# EAGLE board PIC32Dev2 (EAGLE 5.07)
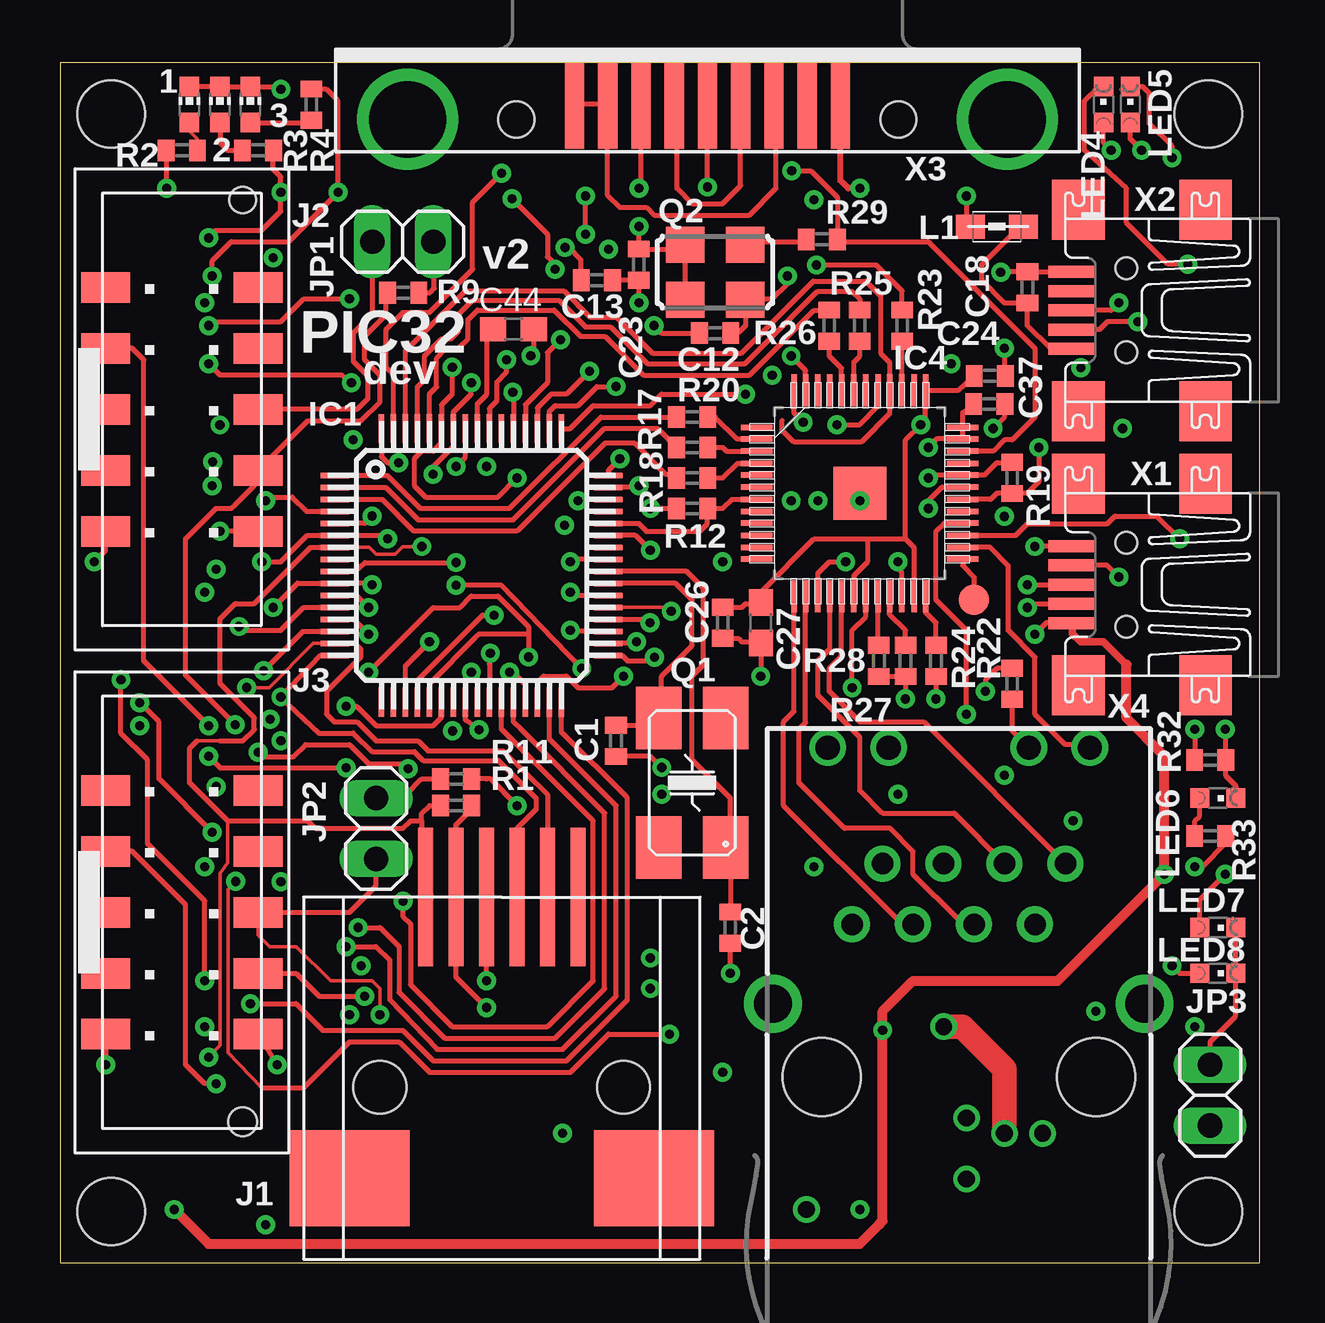
[diagram p0: board, top side]
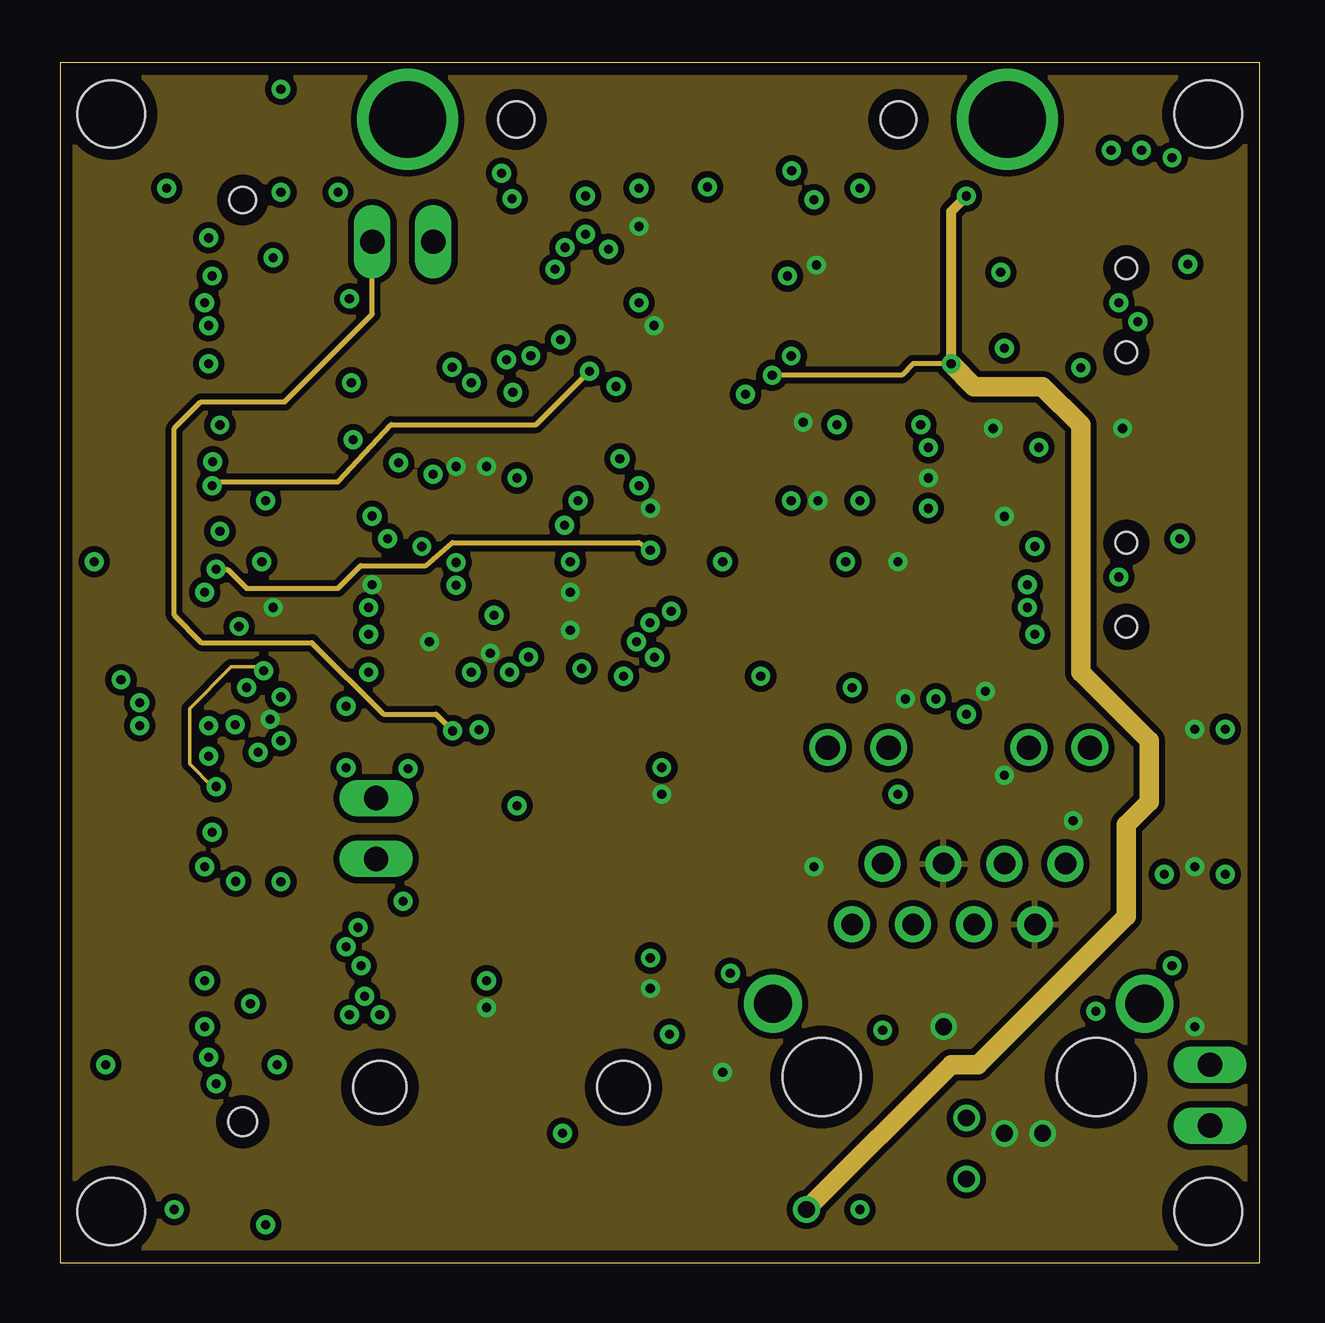
[diagram p1: board, inner layer PwrPlane]
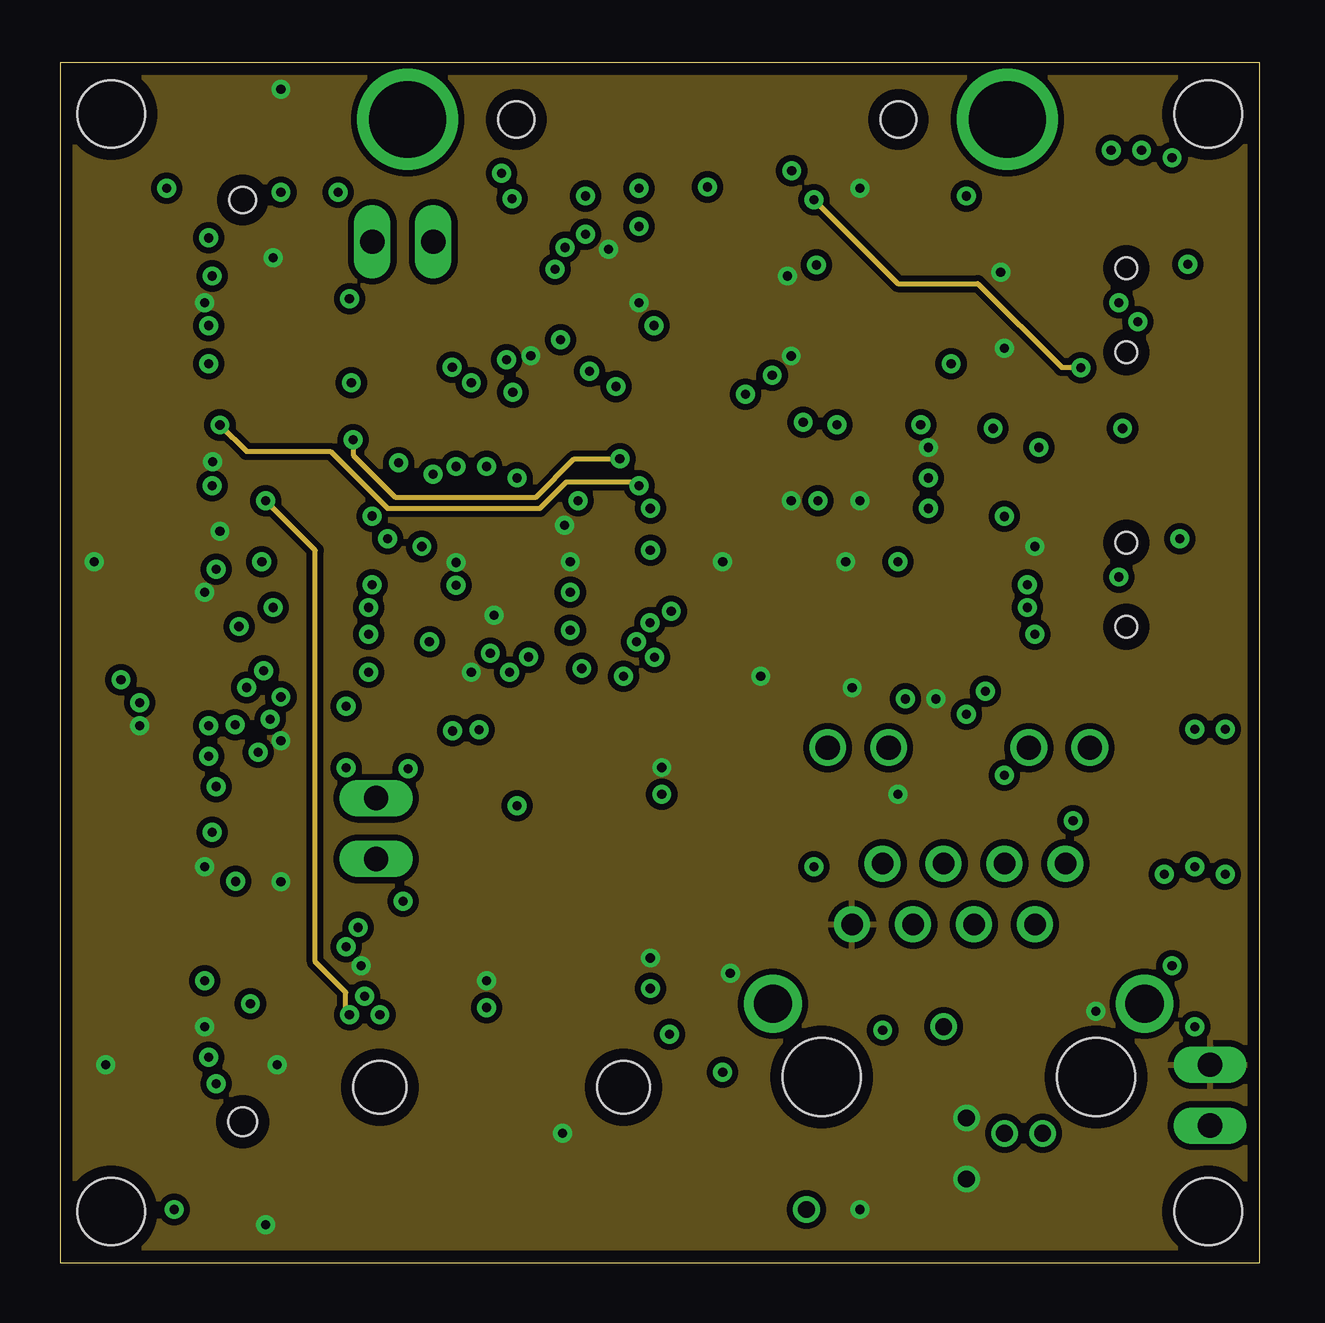
[diagram p2: board, inner layer Gnd]
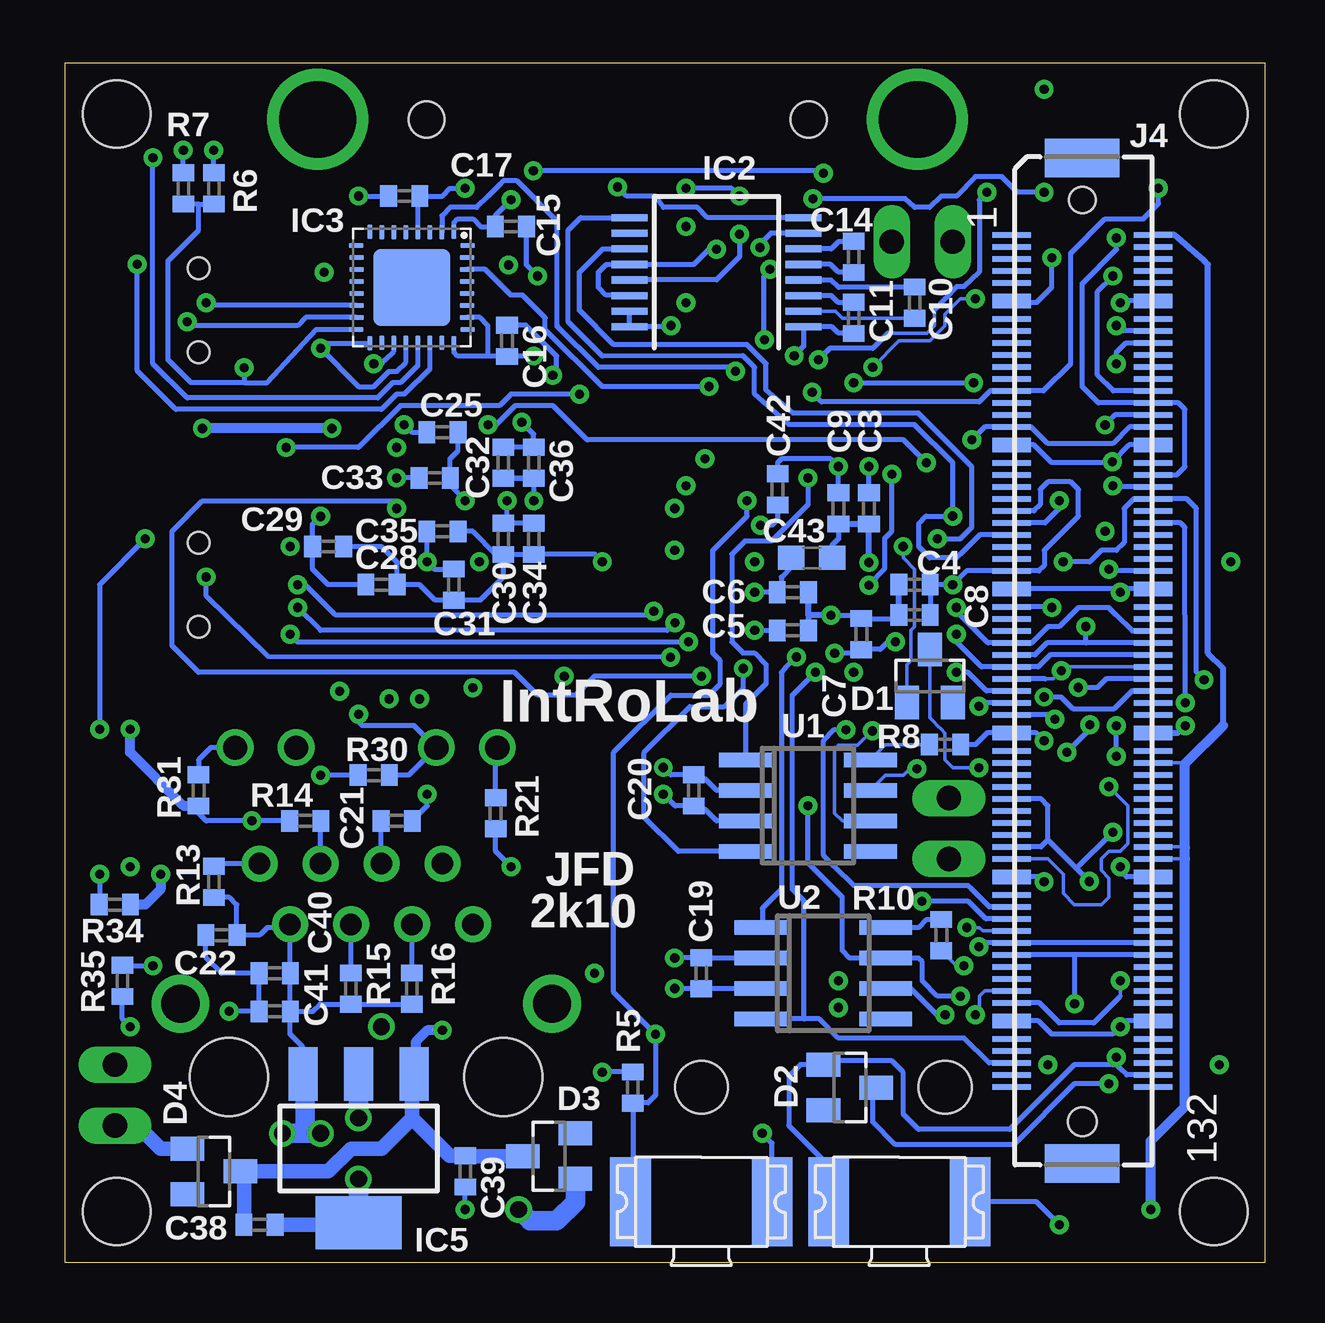
[diagram p3: board, bottom side, seen from below]

Size 50 x 50 mm. Coordinates in mm from the lower left corner, seen from the top.
Outline: 0,0 50,0 50,50 0,50 0,0
Copper layers (1+2*15+16): Top 0.035mm / dielectric 0.25mm / PwrPlane 0.035mm / dielectric 1mm / Gnd 0.035mm / dielectric 0.25mm / Bottom 0.035mm
Design rules "4PCB-4Layers *": minimum track width 6mil, minimum drill 15mil, track to track 6mil, track to pad 6mil, pad to pad 6mil, via to via 6mil, smd to smd 6mil, copper to edge 20mil, drill to drill 8mil, minimum pad ring 10mil, minimum via ring 8mil, stop-mask expansion 4mil, vias tented up to drill 0mil, thermal gap 10mil
Net classes: 0 default: width 0.152 mm, drill 0.381 mm, clearance 0.152 mm; 1 alim: width 0.152 mm, drill 0.381 mm, clearance 0.152 mm
Holes 2.8 mm at 2.13,47.87 47.87,47.87 2.13,2.13 47.87,2.13

## Footprints (pad centres in the part's own frame; a part is rotated, then mirrored left to right if it is on the bottom)
C0402 = smd 0.7 x 0.9: 1 -0.65,0; 2 0.65,0
C0603 = smd 1.1 x 1: 1 -0.85,0; 2 0.85,0
SOT23 = smd 1 x 1.4: 1 -0.95,-1.1; 2 0.95,-1.1; 3 0,1.1
TQFP64-10X10 = smd 1.2 x 0.23: 1 -5.73,2.83; 2 -5.73,2.33; 3 -5.73,1.83; 4 -5.73,1.33; 5 -5.73,0.83; 6 -5.73,0.33; 7 -5.73,-0.17; 8 -5.73,-0.67; 9 -5.73,-1.17; 10 -5.73,-1.67; 11 -5.73,-2.17; 12 -5.73,-2.67; 13 -5.73,-3.17; 14 -5.73,-3.67; 15 -5.73,-4.17; 16 -5.73,-4.67; 33 5.67,-4.67; 34 5.67,-4.17; 35 5.67,-3.67; 36 5.67,-3.17; 37 5.67,-2.67; 38 5.67,-2.17; 39 5.67,-1.67; 40 5.67,-1.17; 41 5.67,-0.67; 42 5.67,-0.17; 43 5.67,0.33; 44 5.67,0.83; 45 5.67,1.33; 46 5.67,1.83; 47 5.67,2.33; 48 5.67,2.83 | smd 0.23 x 1.2: 17 -3.78,-6.62; 18 -3.28,-6.62; 19 -2.78,-6.62; 20 -2.28,-6.62; 21 -1.78,-6.62; 22 -1.28,-6.62; 23 -0.78,-6.62; 24 -0.28,-6.62; 25 0.22,-6.62; 26 0.72,-6.62; 27 1.22,-6.62; 28 1.72,-6.62; 29 2.22,-6.62; 30 2.72,-6.62; 31 3.22,-6.62; 32 3.72,-6.62; 49 3.72,4.78; 50 3.22,4.78; 51 2.72,4.78; 52 2.22,4.78; 53 1.72,4.78; 54 1.22,4.78; 55 0.72,4.78; 56 0.22,4.78; 57 -0.28,4.78; 58 -0.78,4.78; 59 -1.28,4.78; 60 -1.78,4.78; 61 -2.28,4.78; 62 -2.78,4.78; 63 -3.28,4.78; 64 -3.78,4.78
SSOP16 = smd 0.3 x 1.5: 1 -2.275,-3.625; 2 -1.625,-3.625; 3 -0.975,-3.625; 4 -0.325,-3.625; 5 0.325,-3.625; 6 0.975,-3.625; 7 1.625,-3.625; 8 2.275,-3.625; 9 2.275,3.625; 10 1.625,3.625; 11 0.975,3.625; 12 0.325,3.625; 13 -0.325,3.625; 14 -0.975,3.625; 15 -1.625,3.625; 16 -2.275,3.625
QFN32 = smd 0.6 x 0.23: 1 -2.325,1.75; 2 -2.3,1.25; 3 -2.3,0.75; 4 -2.3,0.25; 5 -2.3,-0.25; 6 -2.3,-0.75; 7 -2.3,-1.25; 8 -2.325,-1.75; 17 2.325,-1.75; 18 2.3,-1.25; 19 2.3,-0.75; 20 2.3,-0.25; 21 2.3,0.25; 22 2.3,0.75; 23 2.3,1.25; 24 2.325,1.75 | smd 0.23 x 0.6: 9 -1.75,-2.325; 10 -1.25,-2.3; 11 -0.75,-2.3; 12 -0.25,-2.3; 13 0.25,-2.3; 14 0.75,-2.3; 15 1.25,-2.3; 16 1.75,-2.325; 25 1.75,2.325; 26 1.25,2.3; 27 0.75,2.3; 28 0.25,2.3; 29 -0.25,2.3; 30 -0.75,2.3; 31 -1.25,2.3; 32 -1.75,2.325 | smd 3.2 x 3.2: EXP 0,0
VXH48A = smd 1.321 x 0.229: 1 -4.293,2.743; 2 -4.293,2.261; 3 -4.293,1.753; 4 -4.293,1.245; 5 -4.293,0.762; 6 -4.293,0.254; 7 -4.293,-0.254; 8 -4.293,-0.762; 9 -4.293,-1.245; 10 -4.293,-1.753; 11 -4.293,-2.261; 12 -4.293,-2.743; 25 4.293,-2.743; 26 4.293,-2.261; 27 4.293,-1.753; 28 4.293,-1.245; 29 4.293,-0.762; 30 4.293,-0.254; 31 4.293,0.254; 32 4.293,0.762; 33 4.293,1.245; 34 4.293,1.753; 35 4.293,2.261; 36 4.293,2.743 | smd 0.229 x 1.321: 13 -2.743,-4.293; 14 -2.261,-4.293; 15 -1.753,-4.293; 16 -1.245,-4.293; 17 -0.762,-4.293; 18 -0.254,-4.293; 19 0.254,-4.293; 20 0.762,-4.293; 21 1.245,-4.293; 22 1.753,-4.293; 23 2.261,-4.293; 24 2.743,-4.293; 37 2.743,4.293; 38 2.261,4.293; 39 1.753,4.293; 40 1.245,4.293; 41 0.762,4.293; 42 0.254,4.293; 43 -0.254,4.293; 44 -0.762,4.293; 45 -1.245,4.293; 46 -1.753,4.293; 47 -2.261,4.293; 48 -2.743,4.293 | smd 2.21 x 2.21: HTAB 0,0
SOT223 = smd 1.219 x 2.235: 1 -2.311,-3.099; 2 0,-3.099; 3 2.311,-3.099 | smd 3.6 x 2.2: 4 0,3.099
87545-4111LF = smd 0.63 x 5.76: 1 -3.175,0; 2 -1.905,0; 3 -0.635,0; 4 0.635,0; 5 1.905,0; 6 3.175,0 | smd 5 x 4: P$7 -6.35,-11.71; P$8 6.35,-11.71 | hole 2.2: -5.08,-7.93; 5.08,-7.93
CGRID_10 = smd 1.27 x 2.032: 1 -5.08,-3.175; 2 -5.08,3.175; 3 -2.54,-3.175; 4 -2.54,3.175; 5 0,-3.175; 6 0,3.175; 7 2.54,-3.175; 8 2.54,3.175; 9 5.08,-3.175; 10 5.08,3.175
FX10A-120S/12-S_DATASHEET = smd 0.23 x 1.6: 1 -17.75,-2.95; 2 -17.75,2.95; 3 -17.25,-2.95; 4 -17.25,2.95; 5 -16.75,-2.95; 6 -16.75,2.95; 7 -16.25,-2.95; 8 -16.25,2.95; 9 -15.75,-2.95; 10 -15.75,2.95; 13 -14.25,-2.95; 14 -14.25,2.95; 15 -13.75,-2.95; 16 -13.75,2.95; 17 -13.25,-2.95; 18 -13.25,2.95; 19 -12.75,-2.95; 20 -12.75,2.95; 21 -12.25,-2.95; 22 -12.25,2.95; 23 -11.75,-2.95; 24 -11.75,2.95; 25 -11.25,-2.95; 26 -11.25,2.95; 27 -10.75,-2.95; 28 -10.75,2.95; 29 -10.25,-2.95; 30 -10.25,2.95; 31 -9.75,-2.95; 32 -9.75,2.95; 35 -8.25,-2.95; 36 -8.25,2.95; 37 -7.75,-2.95; 38 -7.75,2.95; 39 -7.25,-2.95; 40 -7.25,2.95; 41 -6.75,-2.95; 42 -6.75,2.95; 43 -6.25,-2.95; 44 -6.25,2.95; 45 -5.75,-2.95; 46 -5.75,2.95; 47 -5.25,-2.95; 48 -5.25,2.95; 49 -4.75,-2.95; 50 -4.75,2.95; 51 -4.25,-2.95; 52 -4.25,2.95; 53 -3.75,-2.95; 54 -3.75,2.95; 57 -2.25,-2.95; 58 -2.25,2.95; 59 -1.75,-2.95; 60 -1.75,2.95; 61 -1.25,-2.95; 62 -1.25,2.95; 63 -0.75,-2.95; 64 -0.75,2.95; 65 -0.25,-2.95; 66 -0.25,2.95; 67 0.25,-2.95; 68 0.25,2.95; 69 0.75,-2.95; 70 0.75,2.95; 71 1.25,-2.95; 72 1.25,2.95; 73 1.75,-2.95; 74 1.75,2.95; 75 2.25,-2.95; 76 2.25,2.95; 79 3.75,-2.95; 80 3.75,2.95; 81 4.25,-2.95; 82 4.25,2.95; 83 4.75,-2.95; 84 4.75,2.95; 85 5.25,-2.95; 86 5.25,2.95; 87 5.75,-2.95; 88 5.75,2.95; 89 6.25,-2.95; 90 6.25,2.95; 91 6.75,-2.95; 92 6.75,2.95; 93 7.25,-2.95; 94 7.25,2.95; 95 7.75,-2.95; 96 7.75,2.95; 97 8.25,-2.95; 98 8.25,2.95; 101 9.75,-2.95; 102 9.75,2.95; 103 10.25,-2.95; 104 10.25,2.95; 105 10.75,-2.95; 106 10.75,2.95; 107 11.25,-2.95; 108 11.25,2.95; 109 11.75,-2.95; 110 11.75,2.95; 111 12.25,-2.95; 112 12.25,2.95; 113 12.75,-2.95; 114 12.75,2.95; 115 13.25,-2.95; 116 13.25,2.95; 117 13.75,-2.95; 118 13.75,2.95; 119 14.25,-2.95; 120 14.25,2.95; 123 15.75,-2.95; 124 15.75,2.95; 125 16.25,-2.95; 126 16.25,2.95; 127 16.75,-2.95; 128 16.75,2.95; 129 17.25,-2.95; 130 17.25,2.95; 131 17.75,-2.95; 132 17.75,2.95 | smd 0.6 x 1.6: 11 -15,-2.95; 12 -15,2.95; 33 -9,-2.95; 34 -9,2.95; 55 -3,-2.95; 56 -3,2.95; 77 3,-2.95; 78 3,2.95; 99 9,-2.95; 100 9,2.95; 121 15,-2.95; 122 15,2.95 | smd 1.6 x 3.1: FOOT$1 -20.95,0; FOOT$2 20.95,0 | hole 1.2: 19.2,0 | hole 1.1: -19.2,0
1X02 = drill 1.016 long: 1 -1.27,0; 2 1.27,0
0805 = smd 1.2 x 1: 1 -1.1,0; 2 1.1,0
CHIP-LED0603 = smd 0.8 x 0.8: A 0,-0.75; C 0,0.75
CHIPLED_0603 = smd 0.8 x 0.8: A 0,-0.75; C 0,0.75
SMT_CRYSTAL = smd 2.6 x 1.9: 1 -2.7,-1.4; 2 2.7,-1.4; 3 2.7,1.4; 4 -2.7,1.4
ASF = smd 1.6 x 1.5: 1 -1.25,-1.15; 2 1.25,-1.15; 3 1.25,1.15; 4 -1.25,1.15
R0402 = smd 0.7 x 0.9: 1 -0.65,0; 2 0.65,0
KSS221GLFS = smd 1.7 x 3.7: A -2.95,0; B 2.95,0
B1,27 = smd 1.27 x 1.27: PP 0,0
SO-08 = smd 0.6 x 2.2: 1 -1.905,-2.6; 2 -0.635,-2.6; 3 0.635,-2.6; 4 1.905,-2.6; 5 1.905,2.6; 6 0.635,2.6; 7 -0.635,2.6; 8 -1.905,2.6
UX60-MB-5ST = smd 2 x 0.5: 1 2.25,1.6; 2 2.25,0.8; 3 2.25,0; 4 2.25,-0.8; 5 2.25,-1.6 | smd 2.2 x 2.5: M1 -3.3,-4.2; M2 -3.3,4.2; M3 2,4.2; M4 2,-4.2 | hole 0.9: 0,-1.75; 0,1.75
DB09_SMT = smd 0.8 x 3.7: 1 -5.54,-6.925; 2 -2.77,-6.925; 3 0,-6.925; 4 2.77,-6.925; 5 5.54,-6.925; 6 -4.155,-6.925; 7 -1.385,-6.925; 8 1.385,-6.925; 9 4.155,-6.925 | drill 3.2 round: P$1 -12.5,-7.55; P$2 12.5,-7.55 | hole 1.5: -7.96,-7.56; 7.96,-7.56
SI-50170 = drill 0.9 pad 1.5 round: 1 4.445,5.842; 2 3.175,3.302; 3 1.905,5.842; 4 0.635,3.302; 5 -0.635,5.842; 6 -1.905,3.302; 7 -3.175,5.842; 8 -4.445,3.302 | drill 1.016 pad 1.5 round: A1 -5.461,10.668; A2 2.921,10.668; C1 -2.921,10.668; C2 5.461,10.668 | drill 1.6 pad 2.2 round: S1 -7.747,0; S2 7.747,0 | hole 3.251: -5.715,-3.048; 5.715,-3.048

## Placement (x,y rotation side)
C1  18p  [C0402]  23.18,21.75 270 top
C2  18p  [C0402]  27.94,13.97 270 top
C3  100n  [C0402]  16.51,31.43 270 bottom
C4  100n  [C0402]  14.61,28.26 180 bottom
C5  100n  [C0402]  19.68,26.35 0 bottom
C6  100n  [C0402]  19.68,27.94 0 bottom
C7  100n  [C0402]  16.83,26.19 90 bottom
C8  100n  [C0402]  14.61,26.99 180 bottom
C9  100n  [C0402]  17.78,31.43 270 bottom
C10  100n  [C0402]  14.61,40.01 90 bottom
C11  100n  [C0402]  17.14,39.37 270 bottom
C12  100n  [C0402]  27.3,38.73 0 top
C13  100n  [C0402]  22.38,40.94 0 top
C14  100n  [C0402]  17.14,41.91 90 bottom
C15  100n  [C0402]  31.43,43.18 180 bottom
C16  4µ7  [C0402]  31.59,38.42 270 bottom
C17  100n  [C0402]  35.88,44.45 0 bottom
C18  10n  [C0402]  40.32,40.64 90 top
C19  100n  [C0402]  23.5,12.06 90 bottom
C20  100n  [C0402]  23.81,19.68 90 bottom
C21  100n  [C0402]  36.2,18.41 0 bottom
C22  100n  [C0402]  43.5,13.65 180 bottom
C23  100n  [C0402]  24.13,41.59 270 top
C24  100n  [C0402]  38.75,36.96 0 top
C25  100n  [C0402]  34.29,34.61 0 bottom
C26  100n  [C0402]  27.62,26.67 270 top
C27  10µ  [C0603]  29.21,26.67 270 top
C28  100n  [C0402]  36.83,28.26 0 bottom
C29  100n  [C0402]  39.05,29.84 0 bottom
C30  100n  [C0402]  31.75,30.16 270 bottom
C31  100n  [C0402]  33.81,28.26 270 bottom
C32  100n  [C0402]  31.75,33.34 270 bottom
C33  100n  [C0402]  34.61,32.7 0 bottom
C34  100n  [C0402]  30.48,30.16 270 bottom
C35  100n  [C0402]  34.29,30.48 0 bottom
C36  100n  [C0402]  30.48,33.34 270 bottom
C37  100n  [C0402]  38.73,35.78 180 top
C38  4µ7  [C0402]  41.91,1.59 0 bottom
C39  100n  [C0402]  33.34,3.81 270 bottom
C40  4µ7  [C0402]  41.27,12.06 180 bottom
C41  100n  [C0402]  41.27,10.48 180 bottom
C42  1µ  [C0402]  20.32,32.23 270 bottom
C43  10µ  [C0603]  18.89,29.37 0 bottom
C44  10u  [C0603]  18.9,38.9 0 top
D1  BAS70-05  [SOT23]  13.97,24.45 0 bottom
D2  BAS70-05  [SOT23]  17.3,7.3 270 bottom
D3  BAS70  [SOT23]  29.84,4.45 90 bottom
D4  BAS70  [SOT23]  43.81,3.81 270 bottom
IC1  PIC32MX795F512H  [TQFP64-10X10]  17.18,29.98 0 top
IC2  MAX3221CAE  [SSOP16]  22.86,41.27 90 bottom
IC3  FT232RQ  [QFN32]  35.56,40.64 270 bottom
IC4  DP83848  [VXH48A]  33.34,32.07 0 top
IC5  TC1262-3.3  [SOT223]  37.78,4.76 180 bottom
J1  ICD3  [87545-4111LF]  18.41,15.24 0 top
J2  CAN1  [CGRID_10]  5.08,35.56 270 top
J3  CAN2  [CGRID_10]  5.08,14.61 270 top
J4  Exp  [FX10A-120S/12-S_DATASHEET]  7.62,25.08 270 bottom
JP1  CAN2  [1X02]  14.29,42.55 180 top
JP2  CAN2  [1X02]  13.18,18.1 270 top
JP3  PWR  [1X02]  47.94,6.99 90 top
L1  MI0805K400R-10  [0805]  39.05,43.18 180 top
LED1  [CHIP-LED0603]  5.4,48.26 0 top
LED2  [CHIP-LED0603]  6.67,48.26 0 top
LED3  [CHIP-LED0603]  7.94,48.26 0 top
LED4  [CHIPLED_0603]  43.5,48.26 0 top
LED5  [CHIPLED_0603]  44.61,48.26 0 top
LED6  [CHIPLED_0603]  48.26,19.37 270 top
LED7  [CHIPLED_0603]  48.26,13.97 270 top
LED8  [CHIPLED_0603]  48.26,12.06 270 top
Q1  8MHz  [SMT_CRYSTAL]  26.35,20 90 top
Q2  FXO-HC536R-50  [ASF]  27.3,41.27 0 top
R1  10k  [R0402]  16.51,19.05 0 top
R2  800  [R0402]  5.08,46.35 180 top
R3  800  [R0402]  8.26,46.35 0 top
R4  800  [R0402]  10.48,48.26 90 top
R5  10k  [R0402]  26.35,7.3 90 bottom
R6  800  [R0402]  43.81,44.77 270 bottom
R7  800  [R0402]  45.09,44.77 270 bottom
R8  10k  [R0402]  13.34,21.59 0 bottom
R9  120  [R0402]  14.31,40.42 180 top
R10  10k  [R0402]  13.49,13.65 270 bottom
R11  120  [R0402]  16.51,20.16 0 top
R12  1k5  [R0402]  26.35,31.43 0 top
R13  49R9  [R0402]  43.81,15.88 270 bottom
R14  49R9  [R0402]  40.01,18.41 180 bottom
R15  49R9  [R0402]  38.1,11.43 270 bottom
R16  49R9  [R0402]  35.56,11.43 270 bottom
R17  33  [R0402]  26.35,33.97 0 top
R18  33  [R0402]  26.35,32.7 0 top
R19  1k5  [R0402]  39.69,32.7 90 top
R20  33  [R0402]  26.35,35.24 0 top
R21  250  [R0402]  32.07,18.73 270 bottom
R22  250  [R0402]  39.69,24.13 90 top
R23  2k2  [R0402]  35.11,39.05 270 top
R24  4k87  [R0402]  36.51,25.08 270 top
R25  33  [R0402]  33.34,39.05 270 top
R26  33  [R0402]  32.07,39.05 270 top
R27  2k2  [R0402]  35.24,25.08 270 top
R28  2k2  [R0402]  34.13,25.08 270 top
R29  33  [R0402]  31.75,42.65 0 top
R30  2k2  [R0402]  37.15,20.32 180 bottom
R31  2k2  [R0402]  44.45,19.68 270 bottom
R32  2k2  [R0402]  47.94,20.95 180 top
R33  510  [R0402]  47.94,17.78 0 top
R34  1k65  [R0402]  47.94,14.92 0 bottom
R35  800  [R0402]  47.62,11.75 270 bottom
SW1  SMT_PB_S  [KSS221GLFS]  15.24,2.54 0 bottom
SW2  SMT_PB_S  [KSS221GLFS]  23.5,2.54 0 bottom
TP1  TPB1,27  [B1,27]  38.1,27.62 0 top
U1  SN65HVD230  [SO-08]  19.05,19.05 270 bottom
U2  SN65HVD230  [SO-08]  18.41,12.06 270 bottom
X1  MINI-USB-UX60-MB-5ST  [UX60-MB-5ST]  44.45,28.26 180 top
X2  MINI-USB-UX60-MB-5ST  [UX60-MB-5ST]  44.45,39.69 180 top
X3  [DB09_SMT]  26.99,55.19 0 top
X4  SI-50170  [SI-50170]  37.47,10.79 0 top

## Library data of the parts
C1-C44 R1-R35 = rcl
D1-D4 = diode
IC1 = PIC32MX795F512
IC2 = maxim2
IC3 = ftdichip2
IC4 = DP83848
IC5 = linear-technology
J1 = RJ12_smt_87545-4111LF
J2 J3 = con-molex-cgrid_smt
J4 = conn-hirose2
JP1-JP3 = pinhead
L1 = wuerth-elektronik
LED1-LED8 = led
Q1 = ABMM2-8.000MHZ-E2-T
Q2 = crystal
SW1 SW2 = jfduval
TP1 = testpad
U1 U2 = Microchip4 Pic
X1 X2 = con-hirose2
X3 = con-subd-smt
X4 = con-stewart2

## Nets
+3V3: C3.1 C4.1 C5.1 C6.1 C7.1 C8.1 C9.1 C12.1 C19.1 C20.1 C21.1 C22.1 C23.1 C28.1 C29.1 C30.1 C31.1 C32.1 C33.1 C34.1 C35.1 C36.1 C37.1 C40.1 C41.1 C42.1 C43.1 IC1.10 IC1.19 IC1.26 IC1.35 IC1.38 IC1.57 IC2.15 IC2.16 IC4.22 IC4.32 IC4.48 IC5.3 J1.2 J4.43 J4.53 J4.57 J4.75 Q2.1 Q2.4 R1.2 R5.2 R12.1 R13.2 R14.2 R15.2 R16.2 R19.2 R21.2 R22.2 R23.1 R27.2 R28.2 R30.2 R31.2 R32.2 R33.2 R35.2 U1.3 U2.3 X4.2 X4.5
+5V: C16.1 C17.1 D3.1 IC3.19 L1.2
+5V/1: C38.1 C39.1 D3.3 D4.3 IC1.34 IC5.1 J4.2 J4.80 J4.82 J4.96 J4.98 R34.2 X1.1
CAN1H: J2.8 R9.2 U1.7
CAN1L: J2.6 JP1.2 U1.6
CAN1RX: IC1.58 J4.18 U1.4
CAN1TX: IC1.59 J4.16 U1.1
CAN2H: J3.8 R11.2 U2.7
CAN2L: J3.6 JP2.2 U2.6
CAN2RX: IC1.29 J4.127 U2.4
CAN2TX: IC1.21 J4.71 U2.1
D+: IC1.37 X1.3
D-: IC1.36 X1.2
EMDC: IC1.30 IC4.31
EMDIO: IC1.49 IC4.30 R19.1
EREF_CLK: IC1.63 IC4.34 R29.2
ERXD0: IC1.61 R25.1
ERXD1: IC1.60 R26.1
ERXDV: IC1.62 IC4.40
ERXERR: IC1.64 IC4.41
ETXD0: IC1.2 R17.1
ETXD1: IC1.3 R18.1
ETXEN: IC1.1 R20.1
GND: C1.2 C2.2 C3.2 C4.2 C5.2 C6.2 C7.2 C8.2 C9.2 C11.2 C12.2 C13.2 C15.1 C16.2 C17.2 C18.2 C19.2 C20.2 C21.2 C22.2 C23.2 C24.2 C25.2 C26.2 C27.2 C28.2 C29.2 C30.2 C31.2 C32.2 C33.2 C34.2 C35.2 C36.2 C37.2 C38.2 C39.2 C40.2 C41.2 C42.2 C43.2 C44.2 IC1.9 IC1.20 IC1.25 IC1.41 IC2.1 IC2.12 IC2.14 IC3.4 IC3.17 IC3.20 IC3.24 IC3.26 IC4.15 IC4.19 IC4.35 IC4.36 IC4.47 IC4.HTAB IC5.2 IC5.4 J1.3 J2.9 J2.10 J3.9 J3.10 J4.11 J4.12 J4.33 J4.34 J4.55 J4.56 J4.77 J4.78 J4.99 J4.100 J4.121 J4.122 JP3.2 LED1.C LED2.C LED3.C LED7.C LED8.C Q2.2 R8.2 R10.2 R24.2 SW1.B SW2.B U1.2 U2.2 X1.5 X2.5 X3.5 X4.8
INT3: IC1.44 IC4.7 R12.2
LED_ACT: IC4.26 R31.1 X4.C2
LED_LINK: IC4.28 R30.1 X4.C1
LED_SPEED: IC4.27 LED6.C R32.1
MCLR: D1.1 D2.1 IC1.7 J1.1 J4.130 R1.1 SW1.A
MDI_RN: IC4.13 R16.1 X4.6
MDI_RP: IC4.14 R15.1 X4.4
MDI_TN: IC4.16 R14.1 X4.3
MDI_TP: IC4.17 R13.1 X4.1
MST_RESET1: D1.3 J2.3
MST_RESET2: D2.3 J3.3
N$1: LED1.A R2.1
N$2: LED2.A R3.1
N$3: LED3.A R4.1
N$4: IC2.8 X3.3
N$5: C10.1 IC2.2
N$6: C10.2 IC2.4
N$7: C14.1 IC2.5
N$8: C14.2 IC2.6
N$9: C11.1 IC2.3
N$10: C13.1 IC2.7
N$11: IC4.3 R17.2
N$12: IC4.4 R18.2
N$13: IC2.13 X3.2
N$14: IC4.2 R20.2
N$15: X3.7 X3.8
N$16: X3.1 X3.4 X3.6
N$17: IC4.43 R25.2
N$19: IC4.44 R26.2
N$20: IC4.25 TP1.PP
N$21: IC4.20 R28.1
N$22: IC4.21 R27.1
N$23: IC4.24 R24.1
N$24: LED6.A R33.1
N$25: IC4.39 R23.2
N$26: R21.1 X4.A1
N$27: R22.1 X4.A2
N$28: LED7.A R34.1
N$29: D4.1 JP3.1
N$30: C44.1 IC1.56
N$32: C18.1 L1.1 X2.1
N$33: R8.1 U1.8
N$34: R10.1 U2.8
N$35: Q2.3 R29.1
N$36: LED8.A R35.1
N$39: JP2.1 R11.1
N$40: JP1.1 R9.1
N$41: C1.1 IC1.39 Q1.3
N$42: C2.1 IC1.40 Q1.1
N$106: C15.2 IC3.1 IC3.16 R6.2 R7.2
N$109: IC3.22 LED4.C
N$110: IC3.21 LED5.C
N$116: LED4.A R6.1
N$117: LED5.A R7.1
PFOUT: C24.1 C25.1 C26.1 C27.1 IC4.18 IC4.23 IC4.37
PGEC1: IC1.15 J1.5 J4.70
PGED1: IC1.16 J1.4 J4.72
RB2: IC1.14 J4.68 J4.69 J4.97
RB3: IC1.13 J4.66 J4.67
RB4: IC1.12 J4.64 J4.65
RB5: IC1.11 J4.62 J4.63
RB9: IC1.22 J4.73
RB11: IC1.24 J4.103
RB12: IC1.27 J4.105
RB13: IC1.28 J4.107
RC13: IC1.47 J4.30
RC14: IC1.48 J4.31 J4.32
RD0: IC1.46 J4.46 J4.87 J4.95 R5.1 SW2.A
RD4: IC1.52 J4.28 J4.38 R3.2
RD5: IC1.53 J4.25 R2.2
RD6: J4.24
RD7: IC1.55 J4.26 R4.2
RD9: IC1.43 J4.54
RF4: IC1.31 J4.109 J4.110
RF5: IC1.32 J4.111 J4.112
RG6: IC1.4 J4.45 J4.117
RX1: IC1.51 IC3.2 J4.40
RX2: IC1.5 IC2.9 J4.47
TX1: IC1.50 IC3.30
TX2: IC1.6 IC2.11 J4.42 J4.119
USB+: IC3.14 X2.3
USB-: IC3.15 X2.2
USBID: IC1.33 X1.4

## Tracks (layer width: path | path; a pad name or v marks a point on that pad's centre or on a via)
+3V3  (via drill 0.38, 0.7)
  Top 0.203: IC1.35 21.59,26.31 v21.27,26.35 | IC1.38 21.4,27.81 v21.27,27.94 | IC1.10 12.96,28.31 v13.02,28.26 | IC1.57 16.91,33.57 v16.51,33.18 | IC1.26 17.91,24.96 v17.94,25.4 | v36.2,32.7 36.32,32.83 IC4.32 38.54,32.83 39.05,33.34 39.67,33.34 R19.2 | IC4.22 35.09,28.73 v34.92,29.21 | R28.2 R27.2 v35.24,23.5 | v24.61,31.43 R12.1 | R33.2 48.59,17.48 47.62,16.51 v47.31,16.51 | R32.2 47.29,22.21 v47.31,22.23 | v38.58,23.81 38.58,24.29 39.05,24.77 39.67,24.77 R22.2 | C37.1 39.38,35.26 v38.89,34.77 | Q2.1 Q2.4 25.86,42.23 24.14,42.23 C23.1 | C23.1 24.13,42.23 | C23.1 v24.13,43.18 | C12.1 25.08,38.73 v24.77,39.05 | v17.78,10.64 17.3,11.11 16.51,11.91 J1.2 16.51,18.26 16.83,18.57 | 16.83,18.57 | 16.83,18.57 16.99,18.73 16.99,19.04 R1.2 | 11.4,28.32 9.91,28.32 v8.89,27.3 | IC1.19 14.4,24.88 v15.4,25.88 | IC4.48 30.59,35.41 v30.98,35.02 | v31.53,41.58 34.02,41.58 35.1,40.5 R23.1
  Top 1.016: v36.83,9.84 37.62,9.84 39.37,8.1 v39.37,5.4
  Bottom 0.203: v21.27,26.35 C5.1 | v21.27,27.94 C6.1 20.16,28.11 20.16,28.57 19.74,29 C43.1 | C9.1 v17.78,33.18 18.1,33.5 20.16,33.5 20.32,33.34 C42.1 | C3.1 v16.51,33.18 | 16.5,25.4 C7.1 16.52,25.4 v17.94,25.4 | R16.2 R15.2 39.38,10.78 39.69,10.48 C41.1 | IC5.3 40.09,8.98 40.64,9.53 40.64,10.46 C41.1 | C21.1 36.84,16.65 X4.5 | R5.2 27.61,7.95 v27.62,7.94 | R13.2 43.16,15.22 42.86,14.92 42.86,13.67 C22.1 41.91,13.65 41.59,13.97 40.77,13.97 X4.2 40.62,14.08 C40.1 C41.1 | R35.2 47.62,10.16 v47.31,9.84 | C35.1 34.92,30.46 v34.92,29.21 34.62,28.91 C31.1 | C33.1 v36.2,32.7 | C32.1 C36.1 30.48,34.52 v30.98,35.02 | C34.1 C30.1 31.59,30.97 v31.59,31.75 | R14.2 v42.23,18.41 44.13,18.41 44.45,18.73 R31.2 | R30.2 v39.37,20.32 | R21.2 32.07,17.14 v31.43,16.51 | C28.1 39.05,28.26 39.69,28.89 39.69,29.83 C29.1 39.7,30.78 v39.37,31.1 | J4.75 8.92,22.83 v8.76,22.65 | J4.57 8.92,27.33 v8.89,27.3 | IC2.15 IC2.16 24.82,39 v24.77,39.05 | U2.3 23.48,11.43 C19.1 24.59,11.41 v24.61,11.43 | C20.1 23.8,19.05 | C20.1 24.59,19.04 v25.08,19.53 | C8.1 C4.1 v13.02,28.26 12.44,28.83 J4.53 9.43,28.83 9.21,29.05 9.21,29.69 7.78,31.11 7.78,32.23 8.1,32.54 9.05,32.54 9.37,32.23 9.37,31.59 9.62,31.33 J4.43 | U1.3 22.86,18.41 23.34,18.89 23.67,18.89 C20.1 | v15.4,25.88 15.72,25.88 16.03,25.56 16.83,25.56
  Bottom 0.406: R31.2 45.09,19.05 47.31,21.27 v47.31,22.23 | v38.89,34.77 v44.29,34.77
  Bottom 0.813: v39.37,5.4 40.01,5.4 | 40.01,5.4 v40.96,5.4 | 40.01,5.4 40.01,7.62
  pour PwrPlane (isolate 0.254): 0,50.16 50.16,50.16 50.16,0 0,0
+5V  (via drill 0.38, 0.7)
  Top 0.203: v37.78,44.45 37.78,43.67 L1.2
  PwrPlane 0.203: v29.69,36.99 35.08,36.99 35.56,37.47 v37.15,37.47
  PwrPlane 0.406: v37.15,37.47 37.15,43.81 v37.78,44.45
  PwrPlane 0.813: v31.11,2.22 37.15,8.26 38.26,8.26 44.45,14.45 44.45,18.26 45.4,19.21 45.4,21.75 42.55,24.61 42.55,34.92 40.96,36.51 38.1,36.51 v37.15,37.47
  Bottom 0.203: v37.78,44.45 C17.1 | IC3.19 36.31,37.98 36.67,37.62 | 36.67,37.62 | 36.67,37.62 36.83,37.47 v37.15,37.47 | C16.1 30.81,39.07 29.53,37.78 29.53,37.15 v29.69,36.99
  Bottom 0.813: D3.1 28.75,2.53 29.53,1.75 30.64,1.75 v31.11,2.22
+5V/1  (via drill 0.38)
  Top 0.203: IC1.34 23.91,25.81 v24.04,25.88 | v40.64,26.19 | v40.64,26.19 41.12,26.67 42.19,26.67 X1.1
  Top 0.305: X1.1 42.2,26.22 42.55,25.88 43.5,25.88 44.45,24.92
  Top 0.406: v34.29,9.68 34.29,10.48 35.56,11.75 41.59,11.75 v46.04,16.19 46.04,21.11 44.45,22.7 44.45,24.92 | v4.76,2.22 6.19,0.79 33.34,0.79 34.13,1.59 34.29,1.75 v34.29,9.68 | v34.29,9.68
  Bottom 0.152: J4.80 J4.82 3.37,20.83 3.33,20.8 | J4.98 3.34,16.83 3.33,16.83 | J4.96 3.36,17.33 3.33,17.3
  Bottom 0.203: v24.04,25.88 40.32,25.88 v40.64,26.19
  Bottom 0.254: J4.2 3.78,42.83 2.54,41.75 2.38,41.59 2.38,25.4 1.75,24.77 1.75,22.38
  Bottom 0.406: v46.04,16.19 46.04,15.56 46.67,14.92 R34.2 | v4.76,2.22 4.76,5.08 3.33,6.51 3.33,16.83 3.33,17.3 3.33,20.8 1.75,22.38 | v34.29,9.68 34.92,9.68 35.4,9.21 35.4,7.93 IC5.1 35.56,7.77
  Bottom 0.61: D3.3 33.32,4.45 C39.1 33.99,4.46 35.56,6.03 | 35.56,7.77 35.56,6.03 | C38.1 42.56,3.65 D4.3 39.05,3.81 38.1,4.76 36.83,4.76 35.56,6.03
CAN1H  (via drill 0.38)
  Top 0.203: 12.7,38.58 12.7,37.62 13.34,36.99 13.34,35.88 12.54,35.08 10.32,35.08 J2.8 8.1,32.86 8.1,32.38 7.3,31.59 | 12.7,38.58 | v8.26,21.27 8.1,21.43 8.45,21.08 9.72,21.08 10.24,21.59 12.06,21.59 12.86,20.8 14.29,20.8 v14.51,20.59 | 7.3,31.59 7.14,31.43 6.51,31.43 5.87,30.8 5.24,30.16 5.24,24.48 v7.3,22.42 | 7.3,31.59 | 12.7,38.58 12.7,38.6 13.6,39.5 13.6,40.36 R9.2
  Bottom 0.152: v14.51,20.59 14.81,20.59 15.08,20.32 15.81,20.32 U1.7
  Bottom 0.203: v7.3,22.42 7.3,22.23 v8.26,21.27
CAN1L  (via drill 0.38)
  Top 0.203: J2.6 12.38,35.56 12.83,36.01 12.83,36.96 12.22,37.56 12.22,38.73 13.02,39.53 JP1.2
  PwrPlane 0.203: JP1.2 13.02,39.53 9.37,35.88 5.87,35.88 4.76,34.77 4.76,26.99 5.89,25.84 10.49,25.84 13.49,22.86 15.67,22.86 v16.37,22.16
  Bottom 0.152: U1.6 17.62,18.41 17.94,18.73 17.94,21.4 17.78,21.57 16.99,21.57 v16.37,22.16
CAN1RX  (via drill 0.38)
  Top 0.203: 15.88,33.5 16.41,34.03 IC1.58 16.41,35.45 17.14,36.2 v17.14,36.67 | 15.88,33.5 | 15.72,33.34 15.88,33.5 | 15.72,33.34 | 15.72,33.34 15.56,33.18 v15.56,32.86 | v16.51,28.23 18.41,28.23 v21.75,24.77 | v6.19,37.47 6.67,36.99 11.75,36.99 v12.14,36.67
  Bottom 0.203: v21.75,24.77 21.75,23.97 22.54,23.18 23.97,23.18 25.88,21.27 25.88,18.57 24.45,17.14 U1.4 | v21.75,24.77 | J4.18 5.8,38.33 6.19,37.94 v6.19,37.47 | v17.14,36.67 v12.14,36.67 | v15.56,32.86 15.56,30.48 15.84,30.19 15.84,28.92 v16.51,28.23
CAN1TX  (via drill 0.38)
  Top 0.203: v19.05,32.7 18.26,31.91 15.24,31.91 14.76,32.38 14.76,33.5 15.08,33.81 15.56,33.81 15.9,34.16 IC1.59 15.9,35.75 16.35,36.2 v16.35,37.32 | v6.19,39.05 | v6.19,39.05 6.35,39.21 9.21,39.21 10.16,40.16 v12.06,40.16
  Bottom 0.152: v12.06,40.16 12.7,40.16 13.34,39.53 13.34,39.05 13.97,38.42 15.26,38.42 v16.35,37.32
  Bottom 0.203: U1.1 21.65,23.28 20.8,24.13 20.8,24.92 21.29,25.42 21.77,25.42 22.23,25.88 22.23,29.53 21.68,30.07 20.57,30.07 19.05,31.59 v19.05,32.7 | J4.16 5.97,38.83 v6.19,39.05
CAN2H  (via drill 0.38)
  Top 0.203: v12.7,11.11 10.79,11.11 9.84,12.06 J3.8 | R11.2 17.78,20.16 17.94,20.16 v19.05,19.05
  Bottom 0.203: v12.7,11.11 13.65,11.11 14.29,11.75 14.29,12.54 14.45,12.7 U2.7 17.3,12.7 17.62,13.02 17.62,15.24 19.05,16.67 v19.05,19.05
CAN2L  (via drill 0.38)
  Top 0.152: J3.6 8.26,13.65 8.73,13.18 9.84,13.18 11.27,11.75 13.02,11.75 13.34,11.43 v13.34,10.34
  Top 0.203: J3.6 12.06,14.61 13.18,15.72 JP2.2
  Bottom 0.203: U2.6 14.76,11.43 13.67,10.34 v13.34,10.34
CAN2RX  (via drill 0.38)
  Top 0.203: IC1.29 19.41,24.09 18.89,24.61 v18.73,24.61
  Bottom 0.203: J4.127 11.51,8.33 12.54,9.37 17.78,9.37 18.57,10.16 19.21,10.16 | v18.73,24.61 19.7,23.65 19.7,15.56 19.53,15.4 19.21,15.08 19.21,10.16 | 19.21,10.16 U2.4
CAN2TX  (via drill 0.38)
  Top 0.203: IC1.21 15.4,24.14 17.3,26.04 | v12.86,24.61 | 17.3,26.04 | 17.3,26.04 17.46,26.19 18.89,26.19 | 18.89,26.19 | v12.86,24.61 15.56,27.3 16.67,27.3 17.14,27.78 18.26,27.78 18.89,27.15 19.53,26.51 19.53,26.19 | 19.53,26.19 v19.53,25.24 | v19.53,25.24 | 19.53,26.19 18.89,26.19
  Bottom 0.203: v19.53,25.24 20,24.77 20.16,24.61 20.16,15.56 20.95,14.76 20.95,14.03 U2.1 | J4.71 11.61,23.83 12.38,24.61 v12.86,24.61 | v12.86,24.61
D+  (via drill 0.38)
  Top 0.152: IC1.37 25.08,27.31 v25.48,27.15
  Top 0.203: v40.32,28.26 X1.3
  Bottom 0.203: v40.32,28.26 40.01,28.26 38.73,26.99 25.64,26.99 v25.48,27.15
D-  (via drill 0.38)
  Top 0.203: IC1.36 24.31,26.81 v24.59,26.67 | X1.2 40.48,27.46 v40.32,27.3
  Bottom 0.203: v24.59,26.67 24.92,26.35 39.37,26.35 v40.32,27.3
EMDC  (via drill 0.38)
  Top 0.203: IC4.31 36.77,32.32 36.2,31.75 v36.2,31.43 | IC1.30 19.91,24.19 20.16,24.45 21.11,24.45 21.59,23.97 23.02,23.97 v23.5,24.45
  Bottom 0.203: v36.2,31.43 36.2,31.75 44.29,31.75 45.56,30.48 45.56,25.72 44.45,24.61 31.27,24.61 30.32,23.65 28.73,23.65 27.94,24.45 v23.5,24.45
EMDIO  (via drill 0.38)
  Top 0.203: IC4.30 38.8,31.81 39.05,32.07 39.67,32.07 R19.1 39.7,32.07 40.32,32.07 40.8,32.54 v40.8,33.97 | v28.57,36.2 25.08,36.2 24.61,35.72 22.23,35.72 22.07,35.56 | IC1.49 21.27,34.76 22.07,35.56 | 22.07,35.56
  Bottom 0.203: v28.57,36.2 31.43,36.2 31.91,35.72 36.04,35.72 37.78,33.97 v40.8,33.97
EREF_CLK  (via drill 0.38)
  Top 0.203: IC4.34 38.9,33.82 39.37,34.29 39.69,34.29 40.64,35.24 40.64,38.1 36.2,42.55 32.5,42.55 R29.2 32.4,44.4 31.3,45.5 v30.5,45.5 | IC1.63 13.9,36.9 | 13.9,36.9 13.9,36.93 | 13.9,36.9 13.9,36.99 13.6,37.3 13.6,38.9 14.3,39.6 15.4,39.6 17.2,41.4 17.2,44.2 v18.4,45.4
  Bottom 0.203: v18.4,45.4 18.5,45.5 v30.5,45.5
ERXD0
  Top 0.203: R25.1 33.34,40.16 33.02,40.48 31.57,40.48 28.56,37.47 24.48,37.47 23.05,38.89 22.95,39 21.9,39 20.8,40.1 17.2,40.1 16.6,39.5 16.6,38.8 16.3,38.5 15.9,38.5 15.2,37.8 15.2,36.8 14.9,36.51 IC1.61
ERXD1
  Top 0.203: IC1.60 15.4,36.2 | R26.1 32.05,39.69 31.43,39.69 28.73,36.99 24.32,36.99 22.71,38.6 21.7,38.6 20.6,39.7 17.4,39.7 17,39.3 17,38.5 16.6,38.1 16.1,38.1 15.7,37.7 15.7,36.5 15.4,36.2 | 15.4,36.2 15.4,36.21
ERXDV
  Top 0.203: 30.1,35.1 30.1,34.7 30.6,34.2 33.4,34.2 34.58,35.38 IC4.40 34.58,37.52 34.2,37.9 34.2,40.3 33.6,40.9 31.4,40.9 28.4,37.9 24.7,37.9 23.2,39.4 22.1,39.4 21,40.5 16.9,40.5 14.4,38.01 IC1.62
ERXERR  (via drill 0.38)
  Top 0.203: IC4.41 34.1,35.69 33.34,34.92 v32.38,34.92 | IC1.64 13.4,33.59 13.65,33.34 v14.11,33.34
  Bottom 0.203: v32.38,34.92 32.05,34.92 31.26,35.72 29.69,35.72 28.26,34.29 15.07,34.29 v14.11,33.34
ETXD0
  Top 0.203: IC1.2 13.57,32.31 14.92,30.96 18.89,30.96 22.7,34.77 24.91,34.77 R17.1
ETXD1
  Top 0.203: IC1.3 13.43,31.81 14.72,30.51 19.07,30.51 22.07,33.5 22.73,34.16 23.94,34.16 25.24,32.86 25.54,32.86 R18.1
ETXEN
  Top 0.203: IC1.1 13.64,32.81 15.02,31.43 18.73,31.43 22.54,35.24 R20.1
GND  (via drill 0.38, 0.7)
  Top 0.203: IC1.41 21.37,29.31 v21.27,29.21 | IC1.9 12.3,28.81 12.7,29.18 v16.51,29.18 | J3.10 v9.05,8.26 | J3.9 v1.91,8.26 | LED7.C LED8.C 49.01,10.28 47.94,9.21 JP3.2 | LED1.C LED2.C LED3.C 9.09,49.01 v9.21,48.9 | v36.2,33.97 36.55,34.33 IC4.35 IC4.36 37.63,35.42 C37.2 | R24.2 v36.51,23.5 | IC4.15 31.59,28.73 32.07,29.21 v32.75,29.21 | v29.21,24.45 C27.2 29.15,25.88 28.42,25.88 28.27,26.02 C26.2 | IC4.19 33.59,26.92 33.02,26.35 v33.02,23.95 | X1.5 40.65,29.86 v40.64,29.84 | v39.37,38.1 39.37,37.16 C24.2 | X2.5 C18.2 39.38,41.29 v39.21,41.27 | v27.94,12.06 C2.2 | v24.13,40.01 C23.2 C13.2 | IC4.47 31.08,37.19 v30.48,37.78 | C12.2 28.26,38.73 28.57,39.05 28.57,40.42 Q2.2 28.59,40.16 29.69,40.16 30.32,40.8 v30.32,41.12 | v17.78,11.75 J1.3 | IC1.25 17.41,24.35 v17.14,24.61 | IC1.20 14.9,24.27 17.62,26.99 v18.1,26.99 | v33.34,31.75 IC4.HTAB | v6.67,30.48 7.46,30.48 J2.10 | J2.9 1.91,29.69 v1.43,29.21 | C1.2 24.62,21.1 v25.08,20.64 | C44.2 19.75,37.91 v19.63,37.79
  Top 0.254: X3.5 32.53,45.1 32.86,44.77 v33.34,44.77
  Bottom 0.152: v12.56,12.38 12.87,12.38 R10.2
  Bottom 0.203: J4.12 5.96,40.08 v6.03,40.01 6.11,40.08 | J4.56 5.89,28.08 v6.03,27.94 6.17,28.08 J4.55 | J4.122 5.79,10.08 v6.03,9.84 6.35,9.53 8.89,9.53 9.45,10.08 J4.121 | SW1.B 9.53,2.54 v8.57,1.59 | SW2.B 20.55,4.99 v20.95,5.4 | C22.2 44.15,12.71 43.5,12.06 C40.2 C41.2 v43.18,10.48 | v33.34,2.22 C39.2 | C30.2 31.75,28.57 32.72,27.61 C31.2 34.59,27.61 35.24,28.26 C28.2 36.18,29.2 36.83,29.84 C29.2 | C30.2 C34.2 30.48,29.53 27.94,29.53 v27.62,29.21 | C30.2 32.05,29.51 33.02,30.48 C35.2 | C36.2 C32.2 30.5,32.69 30.48,32.7 v30.48,31.75 | v34.92,19.53 34.92,19.04 C21.2 | IC3.4 35.31,44.37 C17.2 34.29,44.45 33.97,44.77 v33.34,44.77 | C15.1 30.78,41.58 v30.32,41.12 | v22.86,42.23 23.18,42.23 23.8,41.6 IC2.12 27.46,41.6 27.78,41.27 27.78,40.64 27.46,40.32 26.51,40.32 IC2.14 | IC3.24 33.81,37.94 33.66,37.78 32.38,37.78 | 32.38,37.78 32.08,37.78 C16.2 30.5,37.77 v30.48,37.78 | IC3.26 32.72,39.39 32.38,39.05 32.38,37.78 | U2.2 23.48,12.7 C19.2 24.59,12.71 v24.61,12.7 | C20.2 23.8,20.32 | C20.2 24.78,20.34 v25.08,20.64 | R8.2 12.06,21.59 11.57,22.08 J4.77 9.54,22.08 v9.21,21.75 | J4.99 9.41,16.08 v9.21,15.88 | IC3.20 35.81,37.53 36.2,37.15 36.51,37.15 37.15,36.51 37.78,36.51 v39.37,38.1 39.16,38.31 IC3.17 | C25.2 33.64,33.83 33.97,33.5 33.97,32.72 C33.2 33.96,32.37 v33.34,31.75 | C11.2 17.16,38.73 17.78,38.73 18.05,39 IC2.1 19.23,38.18 v19.63,37.79 | v8.89,41.88 8.89,40.64 9.53,40.01 10.49,40.01 J4.11 | C43.2 18.04,29.9 17.78,30.16 C9.2 | C42.2 20.32,31.43 | v21.03,30.73 20.54,30.73 20.32,30.96 C42.2 | C42.2 | J4.34 5.67,34.08 v6.37,33.38 6.41,33.34 8.89,33.34 9.63,34.08 J4.33 | J4.100 5.76,16.08 6.03,16.35 v6.03,16.51
  Bottom 0.203: 17.78,26.99 16.97,26.99 C7.2 15.4,26.84 C8.2 | U1.2 22.86,19.68 23.34,20.16 23.64,20.16 C20.2
  Bottom 0.254: C9.2 C3.2 v16.51,29.18 | 19.04,26.99 C5.2 | 19.04,26.99 C6.2 | C8.2 C4.2 | 19.04,26.99 v18.1,26.99 17.78,26.99 | J4.78 3.63,22.08 v3.32,22.38
  Bottom 0.61: C38.2 37.86,1.59 IC5.4
  Bottom 0.813: v37.78,6.03 IC5.2 | IC5.4 v37.78,3.49
  pour Gnd (isolate 0.254): 0,50.16 50.16,50.16 50.16,0 0,0
INT3
  Top 0.203: IC4.7 28,31.81 27.62,31.43 R12.2 26.99,31.42 26.99,30.8 26.67,30.48 24.45,30.48 24.12,30.81 IC1.44
LED_ACT
  Top 0.203: X4.C2 42.8,21.59 41.91,21.59 40.64,22.86 40.64,25.24 39.53,26.35 39.53,29.05 38.77,29.81 IC4.26
  Bottom 0.203: X4.C2 43.94,21.46 44.45,20.95 R31.1
LED_LINK  (via drill 0.38)
  Top 0.203: IC4.28 36.85,30.82 36.51,30.48 36.51,27.62 37.78,26.35 v37.78,22.86
  Bottom 0.203: 36.51,20.34 R30.1 35.69,20.32 X4.C1 35.47,22.38 37.62,22.38 37.78,22.54 v37.78,22.86
LED_SPEED  (via drill 0.38)
  Top 0.203: LED6.C 49.01,19.89 48.58,20.32 48.58,20.62 R32.1 48.58,20.65 v48.58,22.23 | IC4.27 39.84,30.32 40.32,30.8 43.66,30.8 43.97,31.11 45.72,31.11 v46.67,30.16
  Bottom 0.203: v48.58,22.23 48.58,28.26 v46.67,30.16
MCLR  (via drill 0.38)
  Top 0.152: v15.08,29.84 14.29,29.84 13.97,29.53 13.18,29.53 12.89,29.81 IC1.7 | 5.71,21.75 6.67,21.75 | 6.99,18.41 6.99,16.67 6.68,16.24 6.68,11.21 6.68,9.06 v6.19,8.57
  Top 0.203: IC1.7 10.44,29.81 8.1,27.46 7.3,27.46 6.67,26.83 6.67,24.13 7.94,22.86 | 5.71,21.75 5.4,21.43 5.4,20 6.99,18.41 10.32,18.41 10.64,18.1 14.29,18.1 14.61,18.41 15.08,18.41 | 6.67,21.75 7.62,21.75 8.06,22.19 8.1,22.23 8.1,22.7 7.94,22.86 | 7.94,22.86 | R1.1 15.4,19.05 15.08,18.73 15.08,18.41 | 15.08,18.41 15.08,18.1 15.24,17.94 J1.1
  Bottom 0.152: v15.08,29.84 15.08,29.37 14.61,28.89 14.61,26.51 14.76,26.35 14.76,25.08 14.92,24.92 D1.1
  Bottom 0.203: SW1.A 18.19,4.06 19.84,5.71 19.84,7.78 19.37,8.26 D2.1 18.24,8.41 15.56,8.41 15.08,7.94 15.08,6.19 14.45,5.56 10.64,5.56 7.94,8.26 6.19,8.26 | J4.130 5.77,7.83 6.03,8.1 6.19,8.26 | 6.19,8.26 v6.19,8.57
MDI_RN
  Top 0.203: X4.6 35.37,14.29 34.92,14.29 30.16,19.05 30.16,22.54 30.59,22.97 IC4.13
  Bottom 0.203: R16.1 X4.6
MDI_RP
  Top 0.203: X4.4 37.91,14.29 37.47,14.29 35.56,16.19 35.56,17.14 34.61,18.1 32.7,18.1 30.8,20 30.8,22.23 31.08,22.5 IC4.14
  Bottom 0.203: R15.1 X4.4
MDI_TN
  Top 0.203: X4.3 37.27,18.73 34.29,18.73 33.34,19.68 33.34,21.91 31.59,23.65 31.59,25.08 32.09,25.58 IC4.16
  Bottom 0.203: R14.1 39.35,16.65 X4.3
MDI_TP
  Top 0.203: X4.1 36,22.54 33.34,22.54 32.07,23.81 32.07,24.77 32.58,25.27 IC4.17
  Bottom 0.203: X4.1 43.7,16.64 R13.1
MST_RESET1  (via drill 0.38)
  Top 0.203: J2.3 3.02,38.1 3.49,37.62 3.49,25.08 v6.19,22.38 | v6.19,21.11 | v6.19,21.11 6.67,20.62 v11.92,20.62
  Bottom 0.152: 13.82,25.4 D1.3 13.97,22.7 13.81,22.54 | 13.49,22.23 13.34,22.07 13.34,20.95 13.02,20.64 11.94,20.64 v11.92,20.62 | 13.49,22.23 | 13.49,22.23 13.65,22.38 13.81,22.54 | 13.81,22.54
  Bottom 0.203: v6.19,21.11 v6.19,22.38
MST_RESET2  (via drill 0.38)
  Top 0.203: J3.3 3.02,17.14 5.24,14.92 5.24,8.26 6.03,7.46 v6.51,7.46
  Bottom 0.203: 15.88,7.3 D2.3 16.35,7.16 16.35,5.87 15.4,4.92 10.48,4.92 7.94,7.46 v6.51,7.46
N$1
  Top 0.152: 5.4,47.31 5.4,47.15 5.71,46.83 5.71,46.37
  Top 0.203: 5.4,47.31 LED1.A | R2.1 5.71,46.37
N$2
  Top 0.203: LED2.A 6.67,46.67 6.99,46.35 R3.1
N$3
  Top 0.203: LED3.A 10.38,47.51 R4.1
N$4  (via drill 0.38)
  Top 0.203: v26.99,44.83 X3.3
  Bottom 0.203: v26.99,44.83 26.61,44.45 25.4,44.45 25.08,43.97 23.65,43.97 23.23,43.55 IC2.8
N$5
  Bottom 0.152: C10.1 17.61,39.35 17.9,39.65 IC2.2
N$6
  Bottom 0.203: IC2.4 18.09,40.95 17.78,40.64 14.62,40.64 C10.2
N$7
  Bottom 0.203: IC2.5 18.11,41.6 17.78,41.27 17.16,41.27 C14.1
N$8
  Bottom 0.203: IC2.6 18.07,42.25 17.78,42.55 17.16,42.55 C14.2
N$9
  Bottom 0.203: IC2.3 18.07,40.3 17.78,40.01 17.16,40.01 C11.1
N$10  (via drill 0.38)
  Top 0.203: v21.05,42.31 21.19,42.31 21.7,41.8 21.7,40.97 C13.1
  Bottom 0.152: 21.11,42.39 21.11,42.37 v21.05,42.31
  Bottom 0.203: IC2.7 20.6,42.9 21.11,42.39
N$11
  Top 0.203: IC4.3 27.77,33.82 27.62,33.97 R17.2
N$12
  Top 0.203: IC4.4 28.23,33.31 27.62,32.7 R18.2
N$13  (via drill 0.38)
  Top 0.203: X3.2 24.22,44.85 v24.13,44.77 | v21.91,42.86 v21.91,44.45
  Bottom 0.203: v24.13,44.77 22.23,44.77 v21.91,44.45 | v21.91,42.86 21.91,41.91 22.86,40.96 IC2.13
N$14
  Top 0.203: IC4.2 28.22,34.33 27.3,35.24 R20.2
N$15
  Top 0.203: X3.8 28.37,44.88 27.62,44.13 26.35,44.13 25.72,44.77 25.72,47.25 X3.7
N$16
  Top 0.203: X3.1 X3.6 22.83,44.48 23.34,43.97 24.45,43.97 24.77,43.66 28.73,43.66 29.84,44.77 29.84,47.28 X3.4
N$17
  Top 0.203: IC4.43 33.08,37.53 33.34,37.78 R25.2
N$19
  Top 0.203: IC4.44 32.58,37.27 32.07,37.78 R26.2
N$20
  Top 0.203: IC4.25 37.63,29.05 38.1,28.57 TP1.PP
N$21
  Top 0.203: IC4.20 34.1,25.84 34.13,25.72 R28.1
N$22
  Top 0.203: IC4.21 34.58,27.01 35.24,26.35 R27.1
N$23
  Top 0.203: IC4.24 36.08,27.1 36.51,26.67 R24.1
N$24
  Top 0.203: LED6.A 47.51,18.62 47.31,18.41 47.31,17.48 R33.1
N$25
  Top 0.203: IC4.39 35.09,38.38 R23.2
N$26
  Bottom 0.203: R21.1 32.07,21.4 X4.A1
N$27
  Top 0.203: R22.1 39.69,22.16 X4.A2
N$28  (via drill 0.38)
  Top 0.203: LED7.A 47.51,15.12 v48.58,16.19
  Bottom 0.203: v48.58,16.19 48.58,14.94 R34.1
N$29
  Bottom 0.61: JP3.1 46.99,5.71 46.04,4.76 D4.1
N$30
  Top 0.203: IC1.56 17.41,35.8 17.8,36.2 17.8,38.65 C44.1
N$32
  Top 0.203: X2.1 42.19,38.1 41.27,38.1 40.32,39.05 C18.1 39.38,39.99 38.42,40.96 38.42,41.59 40.01,43.18 40.01,43.35 L1.1
N$33
  Bottom 0.152: R8.1 15.81,21.59 U1.8
N$34
  Bottom 0.203: U2.8 14.45,13.97 14.13,14.29 13.51,14.29 R10.1
N$35
  Top 0.203: Q2.3 28.68,42.55 31,42.55 R29.1
N$36  (via drill 0.38)
  Top 0.203: LED8.A 46.67,12.06 v46.35,12.38
  Bottom 0.203: v46.35,12.38 47.61,12.38 R35.1
N$39
  Top 0.203: JP2.1 14.43,19.37 14.43,19.51 15.08,20.16 R11.1
N$40
  Top 0.203: R9.1 15.42,40.42 15.6,40.6 15.6,42.5 JP1.1
N$41
  Top 0.203: IC1.39 25.66,28.31 26.35,27.62 26.35,25.72 25.08,24.45 25.08,22.83 Q1.3 24.65,22.4 C1.1
N$42
  Top 0.203: C2.1 27.94,17.11 Q1.1 27.94,17.49 27.94,19.37 26.35,20.95 26.35,24.45 26.83,24.92 26.83,28.1 26.12,28.81 IC1.40
N$106  (via drill 0.38)
  Gnd 0.203: v31.43,44.29 34.92,40.8 38.26,40.8 41.75,37.31 42.53,37.31 v42.55,37.29
  Bottom 0.203: 44.45,44.12 R7.2 | 44.45,44.12 R6.2 | IC3.1 33.81,43.34 33.66,43.5 33.02,43.5 32.7,43.18 C15.2 32.07,43.18 32.07,43.66 v31.43,44.29 | 44.45,44.12 44.45,43.02 45.72,41.75 45.72,37.62 44.77,36.67 42.55,36.67 | IC3.16 39.53,38.89 41.59,36.67 42.55,36.67 | v42.55,37.29 42.55,36.67
N$109  (via drill 0.38)
  Top 0.203: LED4.C 43.3,49.01 42.7,48.42 42.7,46.35 44.45,44.77 44.45,43.34 46.18,41.61 v47.01,41.61
  Bottom 0.203: IC3.22 34.81,37.26 35.88,36.2 36.2,36.2 36.83,35.56 45.4,35.56 47.01,37.16 v47.01,41.61
N$110  (via drill 0.38)
  Top 0.203: LED5.C 45.13,49.01 45.4,48.74 45.4,47.47 46.35,46.51 v46.35,46.04
  Bottom 0.203: IC3.21 35.31,37.4 36.04,36.67 36.35,36.67 36.99,36.04 44.93,36.04 46.35,37.47 v46.35,46.04
N$116  (via drill 0.38)
  Top 0.203: LED4.A 43.5,46.67 v43.81,46.35
  Bottom 0.203: R6.1 v43.81,46.35
N$117  (via drill 0.38)
  Top 0.203: LED5.A 44.61,46.83 v45.09,46.35
  Bottom 0.203: R7.1 v45.09,46.35
PFOUT  (via drill 0.38)
  Top 0.203: IC4.23 35.6,29.81 35.24,30.16 | 33.66,30.16 31.43,30.16 29.21,27.94 C27.1 29.15,27.46 28.57,27.46 28.43,27.32 C26.1 | 33.66,30.16 35.24,30.16 | IC4.18 33.08,28.62 33.66,29.19 33.66,30.16 | 35.24,30.16 35.24,34.29 v35.88,34.92 36.08,35.13 IC4.37 37.46,36.36 C24.1
  Bottom 0.203: v35.88,34.92 35.56,34.61 C25.1
PGEC1  (via drill 0.38)
  Top 0.152: v7.78,23.97 8.71,23.97 10.55,25.81 IC1.15
  Top 0.203: IC1.15 12.29,25.81 12.54,25.56 12.54,25.24 11.11,23.81 11.11,22.86 11.43,22.54 12.38,22.54 13.18,21.75 14.92,21.75 15.34,21.34 18.48,21.34 20.32,19.53 J1.5
  Bottom 0.203: J4.70 6.62,24.33 6.99,23.97 v7.78,23.97
PGED1  (via drill 0.38)
  Top 0.203: J1.4 19.05,18.1 19.84,18.89 19.84,19.37 18.29,20.92 15.14,20.92 14.76,21.3 13.02,21.3 12.22,22.07 10.79,22.07 v9.21,23.57 10.86,25.31 IC1.16
  Bottom 0.203: J4.72 5.54,23.83 6.3,23.07 7.99,23.07 8.49,23.57 v9.21,23.57
RB2  (via drill 0.38)
  Top 0.203: IC1.14 10.13,26.31 v8.49,24.67
  PwrPlane 0.152: v6.51,19.84 6.35,19.84 5.4,20.8 5.4,23.09 7.14,24.83 8.33,24.83 v8.49,24.67
  Bottom 0.152: J4.68 8.33,24.83 v8.49,24.67 8.83,24.33 9.16,24.33 | J4.97 9.05,16.83 8.41,16.19 8.41,15.4 7.94,14.92 6.83,14.92 6.51,15.24 6.51,16.03 6.83,16.35 6.83,16.83 6.51,17.14 6.03,17.14 5.71,17.46 5.71,19.05 v6.51,19.84
  Bottom 0.203: 9.16,24.33 J4.69
RB3  (via drill 0.38)
  Top 0.203: IC1.13 12.24,26.81 v12.86,26.19
  Bottom 0.203: v12.86,26.19 12.86,25.88 11.81,24.83 J4.67 9.46,24.83 8.96,25.33 J4.66
RB4  (via drill 0.38)
  Top 0.203: IC1.12 10.16,27.31 9.21,26.35 7.62,26.35 v7.46,26.51
  Bottom 0.203: J4.65 9.59,25.33 9.09,25.83 7.46,25.83 | J4.64 7.46,25.83 | 7.46,25.83 v7.46,26.51
RB5  (via drill 0.38)
  Top 0.203: IC1.11 12.35,27.81 v12.86,27.3
  Bottom 0.203: v12.86,27.3 12.86,27.15 11.54,25.83 J4.63 9.73,25.83 9.05,26.51 8.57,26.51 7.78,27.3 6.51,27.3 6.19,26.99 | J4.62 5.54,26.33 6.19,26.99 | 6.19,26.99
RB9  (via drill 0.38)
  Top 0.203: v11.92,23.19 12.38,23.18 13.18,22.38 15.56,22.38 15.9,22.73 IC1.22
  Bottom 0.203: J4.73 11.75,23.33 v11.92,23.19
RB11  (via drill 0.38)
  Top 0.203: IC1.24 16.91,22.62 v17.46,22.21
  Bottom 0.203: J4.103 11.5,14.83 12.22,15.56 12.38,15.72 17.14,15.72 17.94,16.51 | 17.94,16.51 | 17.94,16.51 18.4,16.99 18.4,21.75 17.94,22.23 v17.46,22.21
RB12  (via drill 0.38)
  Top 0.203: IC1.27 18.41,22.23 22.23,18.41 22.23,11.75 20.32,9.84 16.35,9.84 14.61,11.59 14.61,14.13 14.29,14.45 v14.3,15.06
  Bottom 0.203: J4.105 11.63,14.33 12.37,15.06 v14.3,15.06
RB13  (via drill 0.38)
  Top 0.203: v12.43,13.97 13.34,13.97 14.13,13.18 14.13,11.27 16.03,9.37 20.64,9.37 22.7,11.43 22.7,18.73 19.21,22.23 | IC1.28 18.91,22.53 19.21,22.23 | 19.21,22.23
  Bottom 0.152: J4.107 11.77,13.83 11.91,13.97 v12.43,13.97
RC13  (via drill 0.38)
  Top 0.203: IC1.47 24.05,32.31 v24.13,32.38
  Gnd 0.203: v24.13,32.38 | v24.13,32.38 23.97,32.54 21.11,32.54 20,31.43 13.65,31.43 11.27,33.81 7.78,33.81 v6.67,34.91
  Bottom 0.203: J4.30 6.26,35.33 v6.67,34.91
RC14  (via drill 0.38)
  Top 0.203: IC1.48 22.86,33.02 v23.34,33.5
  Gnd 0.203: v23.34,33.5 21.43,33.5 19.84,31.91 13.97,31.91 12.22,33.66 v12.22,34.29
  Bottom 0.203: v12.22,34.29 11.68,34.83 J4.31 9.75,34.83 9.05,34.13 6.35,34.13 5.65,34.83 J4.32
RD0  (via drill 0.38)
  Top 0.152: v7.32,15.89 7,15.57 7,8.75 8.41,7.3
  Top 0.203: IC1.46 21.81,31.81 v21.59,31.75 | 8.41,7.3 10.16,7.3 12.06,9.21 14.13,9.21 15.4,7.94 21.27,7.94 22.86,9.53 v25.4,9.53 | v3.32,23.34 3.33,23.34 3.97,22.7 | 3.97,22.7 | 3.97,22.7 4.13,22.54 4.13,20.16 v6.35,17.94
  Bottom 0.203: SW2.A 26.35,2.63 R5.1 26.34,6.67 25.72,6.67 25.4,6.99 v25.4,9.53 27.15,11.27 27.15,21.27 24.77,23.65 23.18,23.65 22.7,24.13 22.7,25.08 23.02,25.4 23.02,29.69 21.59,31.11 v21.59,31.75 | J4.95 9.34,17.33 9.05,17.62 | J4.87 9.33,19.33 9.05,19.05 9.05,17.62 | v7.32,15.89 7.86,16.43 | 7.86,16.43 9.05,17.62 | J4.46 3.53,30.83 3.33,30.64 v3.32,23.34 | 7.86,16.43 v6.35,17.94
RD4  (via drill 0.38)
  Top 0.203: v6.19,42.7 6.51,43.02 8.41,43.02 9.21,43.81 v9.21,44.61 9.21,45.24 8.89,45.56 8.89,46.34 R3.2 | IC1.52 19.41,35.76 20,36.35 | 20,36.35 | 20,36.35 20.32,36.67 20.32,37.92 v20.86,38.47 | v18.84,44.34 20.32,42.86 20.32,41.91 20.64,41.59 v20.64,41.4
  Bottom 0.203: J4.38 3.68,32.83 3.33,33.18 3.33,35.56 3.49,35.72 | 3.49,35.72 3.61,35.83 J4.28 6.94,35.83 7.62,36.51 7.62,40.8 6.19,42.23 v6.19,42.7 | 3.49,35.72 | v18.84,44.34 15,44.34 14.61,43.97 13.97,43.97 13.49,44.45 12.86,44.45 12.08,45.26 10.97,45.26 10.32,44.61 v9.21,44.61 | v20.64,41.4 20.64,41.36 20.9,41.1 20.9,38.51 v20.86,38.47
RD5  (via drill 0.38)
  Top 0.203: v4.45,44.77 4.45,46.34 | IC1.53 18.91,36.02 18.89,36.15 v18.87,36.27
  Top 0.254: 4.45,46.34 R2.2
  Bottom 0.203: v18.87,36.27 18.48,35.88 11.91,35.88 11.45,36.33 J4.25 9.23,36.33 8.1,37.47 8.1,42.07 6.67,43.5 5.08,43.5 4.45,44.13 v4.45,44.77
RD7  (via drill 0.38)
  Top 0.203: v6.35,41.12 6.35,41.75 7.14,42.55 9.53,42.55 v11.59,44.61 11.59,48.42 11.11,48.9 10.49,48.9 R4.2 | IC1.55 17.91,35.6 18.2,35.9 18.2,36.7 18.6,37.1 18.6,37.61 v18.61,37.62
  Bottom 0.152: 13.78,39.72 13.78,39.05 14.1,38.73 15.72,38.73
  Bottom 0.203: J4.26 6.33,36.33 6.99,36.99 6.99,40.48 v6.35,41.12 | 13.78,39.72 12.86,40.67 12.54,40.67 11.91,41.27 11.91,44.29 v11.59,44.61 | 15.72,38.73 16.35,38.1 18.14,38.1 v18.61,37.62
RD9  (via drill 0.38)
  Top 0.203: v24.61,29.69 | v24.61,29.69 24.13,30.16 | IC1.43 23.98,30.31 v24.61,29.69
  PwrPlane 0.203: v6.51,28.89 6.99,28.89 7.78,28.1 11.59,28.1 12.54,29.05 15.24,29.05 16.35,30 24.13,30 v24.61,29.69
  Bottom 0.203: J4.54 6.45,28.83 v6.51,28.89
RF4  (via drill 0.38)
  Top 0.203: IC1.31 20.41,21.82 23.18,19.05 23.18,11.11 20.95,8.89 15.72,8.89 13.75,10.95 13.75,12.62 13.18,13.18 v11.92,13.18
  Bottom 0.203: J4.110 J4.109 11.75,13.33 v11.92,13.18
RF5  (via drill 0.38)
  Top 0.203: IC1.32 20.91,22.12 23.65,19.37 23.65,10.95 21.11,8.41 15.56,8.41 14.29,9.68 10.95,9.68 9.84,10.79 v7.94,10.79
  Bottom 0.203: J4.112 7.94,12.83 | 7.94,12.83 J4.111 | 7.94,12.83 v7.94,10.79
RG6  (via drill 0.38)
  Top 0.203: 8.57,31.59 v8.57,31.75 8.73,31.91 9.68,31.91 10.28,31.31 IC1.4
  Gnd 0.203: v12.06,10.34 11.91,10.49 11.91,11.27 10.64,12.54 10.64,29.69 v8.57,31.75
  Bottom 0.152: J4.117 11.69,11.33 11.91,11.11 11.91,10.64 v12.06,10.34
  Bottom 0.203: J4.45 9.17,30.83 8.57,31.43 v8.57,31.75
RX1  (via drill 0.38)
  Top 0.203: IC1.51 19.91,35.62 20.48,36.2 21.11,36.2 v22.07,37.15
  PwrPlane 0.203: v6.35,32.38 6.51,32.54 11.59,32.54 13.81,34.92 19.84,34.92 v22.07,37.15
  Bottom 0.203: v22.07,37.15 22.23,37.31 27.78,37.31 29.53,39.05 29.5,39.08 29.5,43.4 31.18,45.09 31.75,45.09 31.91,44.93 | J4.40 6.3,32.33 v6.35,32.38 | IC3.2 34.31,43.64 33.97,43.97 32.86,43.97 32.38,44.45 | 32.38,44.45 | 31.91,44.93 32.38,44.45 | 31.91,44.93
RX2  (via drill 0.38)
  Top 0.203: IC1.5 12.71,30.81 v13.02,31.11
  Bottom 0.203: IC2.9 28.52,43.55 29.05,43.02 29.05,39.21 27.62,37.78 21.77,37.8 21.27,37.31 21.27,36.2 19.84,34.92 14.61,34.92 13.02,33.34 v13.02,31.11 14.13,31.11 14.43,30.8 14.43,29.84 13.97,29.37 12.86,29.37 12.7,29.53 | J4.47 11.89,30.33 12.7,29.53 | 12.7,29.53
TX1  (via drill 0.38)
  Top 0.203: IC1.50 20.41,35.49 20.64,35.72 21.59,35.72 22.38,36.51 v23.18,36.51
  Bottom 0.203: v23.18,36.51 27.62,36.51 30,38.88 30,39.37 30.96,40.32 31.43,40.32 32.5,41.39 IC3.30
TX2  (via drill 0.38)
  Top 0.203: v13.65,30.16 13.51,30.31 IC1.6 10.31,30.31 9.21,29.21 v8.41,29.21 | 2.7,24.45 v2.54,24.29 2.54,22.07 3.65,20.95 3.65,17.46 6.03,15.08 v6.03,11.75
  Bottom 0.152: 6.03,11.11 v6.03,11.75
  Bottom 0.203: IC2.11 27.6,42.25 28.57,41.27 28.57,39.69 27.15,38.26 21.59,38.26 20.8,37.47 20.8,36.35 19.68,35.4 14.45,35.4 12.22,33.18 12.22,30.64 12.7,30.16 v13.65,30.16 | v8.41,29.21 7.3,29.21 6.83,29.69 6.19,29.69 5.87,30 5.87,31.43 5.47,31.83 J4.42 3.26,31.83 2.86,31.43 2.86,24.61 v2.54,24.29 | J4.119 9.4,10.83 8.57,10 7.14,10 6.03,11.11
USB+  (via drill 0.38)
  Top 0.203: v44.13,40.01 43.81,39.69 X2.3
  Bottom 0.203: IC3.14 44.02,39.89 v44.13,40.01
USB-  (via drill 0.38)
  Top 0.203: X2.2 43.33,38.89 43.66,39.21 v44.93,39.21
  Bottom 0.203: IC3.15 39.98,39.39 40.32,39.05 44.77,39.05 v44.93,39.21
USBID  (via drill 0.38)
  Top 0.203: X1.4 43.65,29.06 v44.13,28.57 | IC1.33 23.43,25.31 23.65,25.08 24.61,25.08 v24.78,25.23
  Bottom 0.203: v44.13,28.57 44.13,27.78 41.55,25.26 v24.78,25.23

## Text on the board
tNames: 1 | 3 | 2 | v2 | PIC32 | dev
bNames: IntRoLab | JFD | 2k10